# EAGLE board module_RevD (EAGLE 9.1.1)
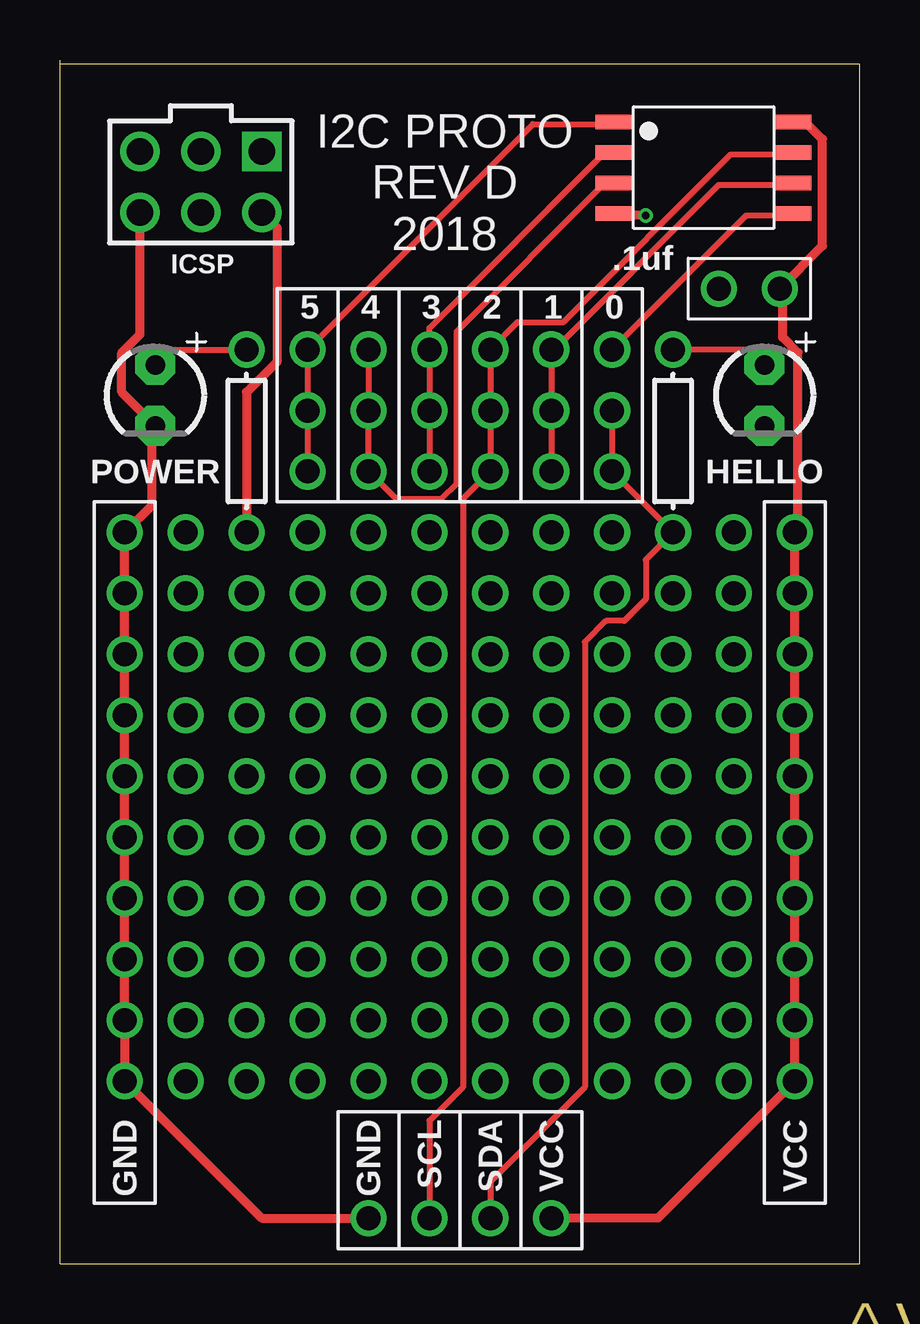
[diagram p0: board, top side]
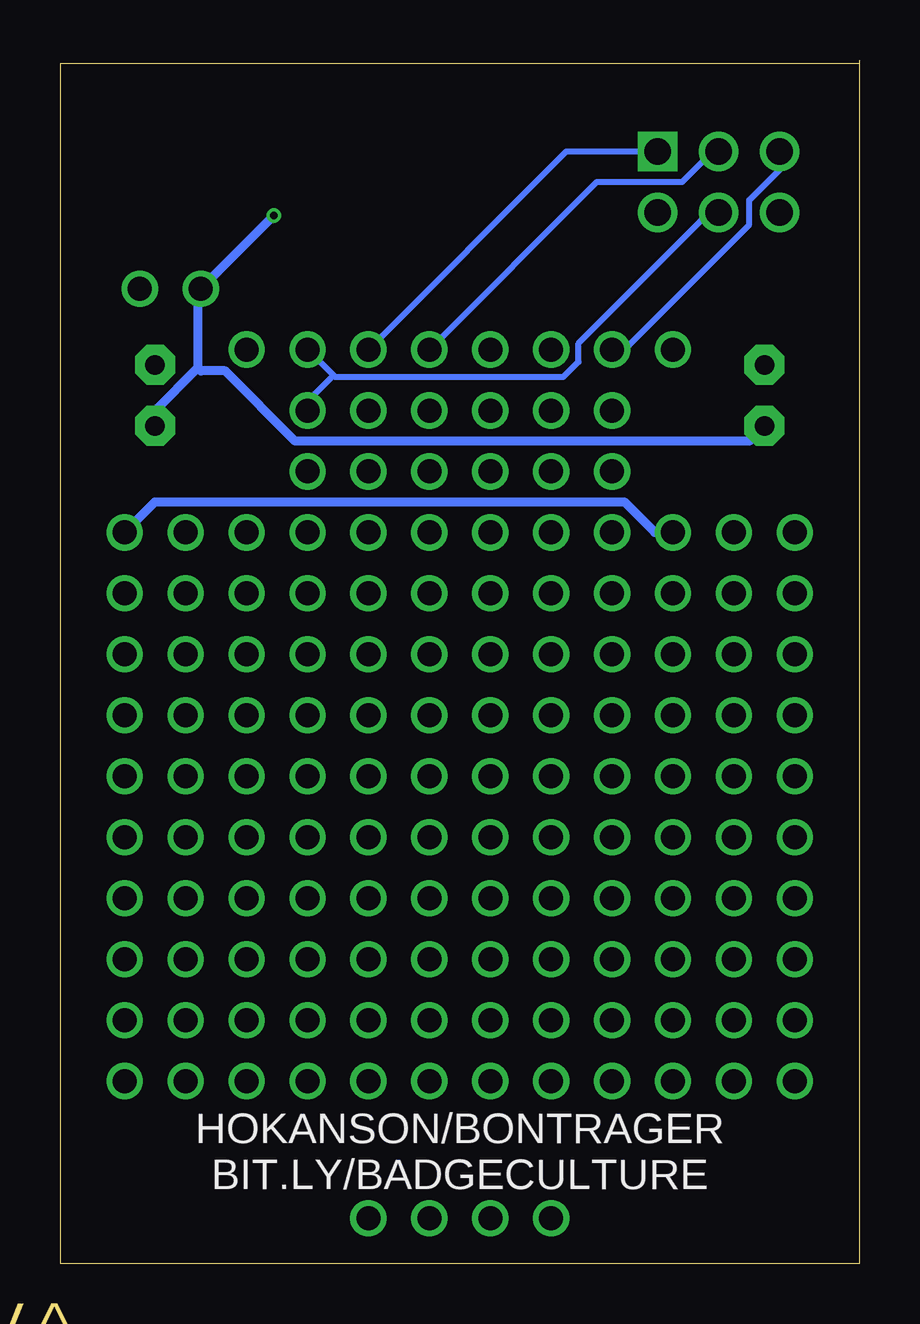
[diagram p1: board, bottom side, seen from below]

Size 33.34 x 50.16 mm. Coordinates in mm from the lower left corner, seen from the top.
Outline: 33.33,0 33.33,50 0,50
Outline: 0,50.16 0,0 33.34,0
Copper layers (1*16): Top 0.035mm / dielectric 1.5mm / Bottom 0.035mm
Design rules "Seeed_40mil_clearance *": minimum track width 6mil, minimum drill 12mil, track to track 6mil, track to pad 6mil, pad to pad 6mil, via to via 6mil, smd to smd 0mil, copper to edge 1.5mm, drill to drill 10mil, minimum pad ring 10mil, minimum via ring 6mil, stop-mask expansion 2mil, vias tented up to drill 100mil, thermal gap 10mil
Net classes: 0 default: width 0.254 mm, clearance 0.254 mm; 1 VCC: width 0.381 mm, clearance 0.254 mm; 2 GND: width 0.381 mm, clearance 0.254 mm

## Footprints (pad centres in the part's own frame; a part is rotated, then mirrored left to right if it is on the bottom)
LED3MM = drill 0.813 pad 1.676 octagon: NEG 1.27,0; POS -1.27,0
SOT127P798X216-8N = smd 1.5 x 0.6: GND -3.75,-1.905; PB0 3.75,-1.905; PB1 3.75,-0.635; PB2 3.75,0.635; PB3 -3.75,0.635; PB4 -3.75,-0.635; PB5 -3.75,1.905; VCC 3.75,1.905
HDRV6W64P254_2X3_762X508X868P = drill 1.1 pad 1.65: 0/MOSI/SDA 0,1.27; 2/SCK/SCL 0,3.81; 5/RST -2.54,3.81; GND -2.54,1.27; VCC 2.54,1.27 | drill 1.1 pad 1.65 square: 1/MISO 2.54,3.81
1X01 = drill 1: P$1 0,0
DECOUPLING_CAP = drill 1: P$1 0,0; P$2 2.54,0
AXIAL-0.3 = drill 1: P$3 -3.81,0; P$4 3.81,0

## Placement (x,y rotation side)
HELLO  LED3MM  [LED3MM]  29.37,36.2 270 top
IC1  ATTINY85-20SU  [SOT127P798X216-8N]  26.83,45.68 0 top
J1  M20-9980346  [HDRV6W64P254_2X3_762X508X868P]  5.88,42.55 0 top
POWER  LED3MM  [LED3MM]  3.97,36.2 270 top
U$1  ONE_PAD  [1X01]  7.78,15.24 0 top
U$2  ONE_PAD  [1X01]  5.24,22.86 0 top
U$3  ONE_PAD  [1X01]  5.24,20.32 0 top
U$4  ONE_PAD  [1X01]  5.24,17.78 0 top
U$5  ONE_PAD  [1X01]  5.24,15.24 0 top
U$6  ONE_PAD  [1X01]  5.24,12.7 0 top
U$7  ONE_PAD  [1X01]  5.24,10.16 0 top
U$8  ONE_PAD  [1X01]  5.24,7.62 0 top
U$9  ONE_PAD  [1X01]  7.78,22.86 0 top
U$10  ONE_PAD  [1X01]  7.78,12.7 90 top
U$11  ONE_PAD  [1X01]  7.78,20.32 0 top
U$12  ONE_PAD  [1X01]  7.78,10.16 0 top
U$13  ONE_PAD  [1X01]  7.78,17.78 0 top
U$14  ONE_PAD  [1X01]  7.78,7.62 0 top
U$15  ONE_PAD  [1X01]  10.32,22.86 0 top
U$16  ONE_PAD  [1X01]  12.86,22.86 0 top
U$17  ONE_PAD  [1X01]  10.32,10.16 0 top
U$18  ONE_PAD  [1X01]  10.32,20.32 0 top
U$19  ONE_PAD  [1X01]  12.86,20.32 0 top
U$20  ONE_PAD  [1X01]  10.32,7.62 0 top
U$21  ONE_PAD  [1X01]  10.32,17.78 0 top
U$22  ONE_PAD  [1X01]  12.86,17.78 0 top
U$23  ONE_PAD  [1X01]  12.86,10.16 0 top
U$24  ONE_PAD  [1X01]  10.32,15.24 0 top
U$25  ONE_PAD  [1X01]  12.86,15.24 0 top
U$26  ONE_PAD  [1X01]  12.86,7.62 0 top
U$27  ONE_PAD  [1X01]  10.32,12.7 0 top
U$28  ONE_PAD  [1X01]  12.86,12.7 0 top
U$29  ONE_PAD  [1X01]  15.4,22.86 0 top
U$30  ONE_PAD  [1X01]  17.94,22.86 0 top
U$31  ONE_PAD  [1X01]  20.48,22.86 0 top
U$32  ONE_PAD  [1X01]  23.02,22.86 0 top
U$33  ONE_PAD  [1X01]  15.4,20.32 0 top
U$34  ONE_PAD  [1X01]  17.94,20.32 0 top
U$35  ONE_PAD  [1X01]  20.48,20.32 0 top
U$36  ONE_PAD  [1X01]  23.02,20.32 0 top
U$37  ONE_PAD  [1X01]  15.4,17.78 0 top
U$38  ONE_PAD  [1X01]  17.94,17.78 0 top
U$39  ONE_PAD  [1X01]  20.48,17.78 0 top
U$40  ONE_PAD  [1X01]  23.02,17.78 0 top
U$41  ONE_PAD  [1X01]  15.4,15.24 0 top
U$42  ONE_PAD  [1X01]  17.94,15.24 0 top
U$43  ONE_PAD  [1X01]  20.48,15.24 0 top
U$44  ONE_PAD  [1X01]  23.02,15.24 0 top
U$45  ONE_PAD  [1X01]  15.4,12.7 0 top
U$46  ONE_PAD  [1X01]  17.94,12.7 0 top
U$47  ONE_PAD  [1X01]  20.48,12.7 0 top
U$48  ONE_PAD  [1X01]  23.02,12.7 0 top
U$49  ONE_PAD  [1X01]  15.4,10.16 0 top
U$50  ONE_PAD  [1X01]  17.94,10.16 0 top
U$51  ONE_PAD  [1X01]  20.48,10.16 0 top
U$52  ONE_PAD  [1X01]  23.02,10.16 0 top
U$53  ONE_PAD  [1X01]  15.4,7.62 0 top
U$54  ONE_PAD  [1X01]  17.94,7.62 0 top
U$55  ONE_PAD  [1X01]  20.48,7.62 0 top
U$56  ONE_PAD  [1X01]  23.02,7.62 0 top
U$57  ONE_PAD  [1X01]  25.56,22.86 0 top
U$58  ONE_PAD  [1X01]  28.1,22.86 0 top
U$59  ONE_PAD  [1X01]  25.56,10.16 0 top
U$60  ONE_PAD  [1X01]  25.56,20.32 0 top
U$61  ONE_PAD  [1X01]  28.1,20.32 0 top
U$62  ONE_PAD  [1X01]  25.56,7.62 0 top
U$63  ONE_PAD  [1X01]  25.56,17.78 0 top
U$64  ONE_PAD  [1X01]  28.1,17.78 0 top
U$65  ONE_PAD  [1X01]  28.1,10.16 0 top
U$66  ONE_PAD  [1X01]  25.56,15.24 0 top
U$67  ONE_PAD  [1X01]  28.1,15.24 0 top
U$68  ONE_PAD  [1X01]  28.1,7.62 0 top
U$69  ONE_PAD  [1X01]  25.56,12.7 0 top
U$70  ONE_PAD  [1X01]  28.1,12.7 0 top
U$71  GND  [1X01]  12.86,1.91 180 top
U$72  SDA  [1X01]  17.94,1.91 0 top
U$73  SCL  [1X01]  15.4,1.91 0 top
U$74  VCC  [1X01]  20.48,1.91 90 top
U$75  ONE_PAD  [1X01]  23.02,38.1 0 top
U$76  ONE_PAD  [1X01]  23.02,35.56 0 top
U$77  ONE_PAD  [1X01]  23.02,33.02 0 top
U$78  ONE_PAD  [1X01]  20.48,38.1 0 top
U$79  ONE_PAD  [1X01]  20.48,35.56 0 top
U$80  ONE_PAD  [1X01]  20.48,33.02 0 top
U$81  ONE_PAD  [1X01]  17.94,38.1 0 top
U$82  ONE_PAD  [1X01]  17.94,33.02 0 top
U$83  ONE_PAD  [1X01]  17.94,35.56 0 top
U$84  ONE_PAD  [1X01]  15.4,38.1 0 top
U$85  ONE_PAD  [1X01]  15.4,33.02 0 top
U$86  ONE_PAD  [1X01]  15.4,35.56 0 top
U$87  ONE_PAD  [1X01]  12.86,35.56 0 top
U$88  ONE_PAD  [1X01]  12.86,38.1 0 top
U$89  ONE_PAD  [1X01]  12.86,33.02 0 top
U$90  ONE_PAD  [1X01]  10.32,35.56 0 top
U$91  ONE_PAD  [1X01]  10.32,38.1 0 top
U$92  ONE_PAD  [1X01]  10.32,33.02 0 top
U$93  ONE_PAD  [1X01]  5.24,25.4 90 top
U$94  ONE_PAD  [1X01]  5.24,27.94 90 top
U$95  ONE_PAD  [1X01]  5.24,30.48 90 top
U$96  ONE_PAD  [1X01]  23.02,30.48 90 top
U$97  ONE_PAD  [1X01]  7.78,25.4 90 top
U$98  ONE_PAD  [1X01]  7.78,27.94 90 top
U$99  ONE_PAD  [1X01]  2.7,17.78 0 top
U$100  ONE_PAD  [1X01]  2.7,30.48 0 top
U$101  ONE_PAD  [1X01]  10.32,25.4 90 top
U$102  ONE_PAD  [1X01]  10.32,27.94 90 top
U$103  ONE_PAD  [1X01]  10.32,30.48 90 top
U$104  ONE_PAD  [1X01]  28.1,30.48 90 top
U$105  ONE_PAD  [1X01]  12.86,25.4 90 top
U$106  ONE_PAD  [1X01]  12.86,27.94 90 top
U$107  ONE_PAD  [1X01]  12.86,30.48 90 top
U$108  ONE_PAD  [1X01]  25.56,27.94 90 top
U$109  ONE_PAD  [1X01]  15.4,25.4 90 top
U$110  ONE_PAD  [1X01]  15.4,27.94 90 top
U$111  ONE_PAD  [1X01]  15.4,30.48 90 top
U$112  ONE_PAD  [1X01]  28.1,27.94 90 top
U$113  ONE_PAD  [1X01]  17.94,25.4 90 top
U$114  ONE_PAD  [1X01]  17.94,27.94 90 top
U$115  ONE_PAD  [1X01]  17.94,30.48 90 top
U$116  ONE_PAD  [1X01]  25.56,25.4 90 top
U$117  ONE_PAD  [1X01]  20.48,25.4 90 top
U$118  ONE_PAD  [1X01]  20.48,27.94 90 top
U$119  ONE_PAD  [1X01]  20.48,30.48 90 top
U$120  ONE_PAD  [1X01]  28.1,25.4 90 top
U$121  ONE_PAD  [1X01]  23.02,25.4 90 top
U$122  ONE_PAD  [1X01]  23.02,27.94 90 top
U$123  DECOUPLING_CAP  [DECOUPLING_CAP]  27.46,40.64 0 top
U$124  ONE_PAD  [1X01]  2.7,15.24 0 top
U$125  ONE_PAD  [1X01]  2.7,27.94 0 top
U$126  RESISTOR  [AXIAL-0.3]  7.78,34.29 270 top
U$127  RESISTOR  [AXIAL-0.3]  25.56,34.29 270 top
U$128  ONE_PAD  [1X01]  2.7,12.7 0 top
U$129  ONE_PAD  [1X01]  2.7,25.4 0 top
U$130  ONE_PAD  [1X01]  2.7,10.16 0 top
U$131  ONE_PAD  [1X01]  2.7,22.86 0 top
U$132  ONE_PAD  [1X01]  2.7,7.62 0 top
U$133  ONE_PAD  [1X01]  2.7,20.32 0 top
U$134  ONE_PAD  [1X01]  30.64,17.78 0 top
U$135  ONE_PAD  [1X01]  30.64,30.48 0 top
U$136  ONE_PAD  [1X01]  30.64,15.24 0 top
U$137  ONE_PAD  [1X01]  30.64,27.94 0 top
U$138  ONE_PAD  [1X01]  30.64,12.7 0 top
U$139  ONE_PAD  [1X01]  30.64,25.4 0 top
U$140  ONE_PAD  [1X01]  30.64,10.16 0 top
U$141  ONE_PAD  [1X01]  30.64,22.86 0 top
U$142  ONE_PAD  [1X01]  30.64,7.62 0 top
U$143  ONE_PAD  [1X01]  30.64,20.32 0 top

## Library data of the parts
HELLO POWER U$1-U$143 = BadgeParts
IC1 = BadgeParts; ARROW_PART_NUMBER: ATTINY85-20SU; ARROW_PRICE/STOCK: https://www.arrow.com/en/products/attiny85-20su/microchip-technology; DESCRIPTION: MICROCHIP - ATTINY85-20SU - MICROCONTROLLER MCU, 8 BIT, ATTINY, 20MHZ, SOIC-8; HEIGHT: 2.16mm; MANUFACTURER_NAME: Microchip; MANUFACTURER_PART_NUMBER: ATTINY85-20SU; RS_PART_NUMBER: 1331674; RS_PRICE/STOCK: http://uk.rs-online.com/web/p/products/1331674
J1 = BadgeParts; ARROW_PART_NUMBER: M20-9980346; ARROW_PRICE/STOCK: http://uk.rs-online.com/web/p/products/7457046P; DESCRIPTION: 03+03 DIL Vertical Pin Header HARWIN M20 Series, 2.54mm Pitch 6 Way 2 Row Straight PCB Header, Solder Termination, 3A; HEIGHT: 8.68mm; MANUFACTURER_NAME: HARWIN; MANUFACTURER_PART_NUMBER: M20-9980346; RS_PART_NUMBER: 7457046P; RS_PRICE/STOCK: http://uk.rs-online.com/web/p/products/7457046P

## Nets
GND [GND]: HELLO.NEG IC1.GND J1.GND POWER.NEG U$71.P$1 U$99.P$1 U$100.P$1 U$123.P$1 U$124.P$1 U$125.P$1 U$128.P$1 U$129.P$1 U$130.P$1 U$131.P$1 U$132.P$1 U$133.P$1
N$1: POWER.POS U$126.P$3
N$2: HELLO.POS U$127.P$3
PB0: IC1.PB0 J1.0/MOSI/SDA U$72.P$1 U$75.P$1 U$76.P$1 U$77.P$1 U$127.P$4
PB1: IC1.PB1 J1.1/MISO U$78.P$1 U$79.P$1 U$80.P$1
PB2: IC1.PB2 J1.2/SCK/SCL U$73.P$1 U$81.P$1 U$82.P$1 U$83.P$1
PB3: IC1.PB3 U$84.P$1 U$85.P$1 U$86.P$1
PB4: IC1.PB4 U$87.P$1 U$88.P$1 U$89.P$1
PB5: IC1.PB5 J1.5/RST U$90.P$1 U$91.P$1 U$92.P$1
VCC [VCC]: IC1.VCC J1.VCC U$74.P$1 U$123.P$2 U$126.P$4 U$134.P$1 U$135.P$1 U$136.P$1 U$137.P$1 U$138.P$1 U$139.P$1 U$140.P$1 U$141.P$1 U$142.P$1 U$143.P$1

## Tracks (layer width: path | path; a pad name or v marks a point on that pad's centre or on a via)
GND  (via drill 0.3)
  Top 0.381: v24.42,43.69 23.15,43.69 IC1.GND | J1.GND 3.33,38.73 2.57,37.97 2.57,36.32 POWER.NEG 3.84,34.8 3.84,31.62 U$100.P$1 U$125.P$1 U$129.P$1 U$131.P$1 U$133.P$1 U$99.P$1 U$124.P$1 U$128.P$1 U$130.P$1 U$132.P$1 8.41,1.91 U$71.P$1
  Bottom 0.381: v24.42,43.69 U$123.P$1 27.59,40.51 27.59,37.34 | HELLO.NEG 29.37,35.56 27.59,37.34 | POWER.NEG 4.61,34.29 23.53,34.29 26.45,37.21 27.46,37.21 27.59,37.34
N$1
  Top 0.254: U$126.P$3 4.61,38.1 POWER.POS
N$2
  Top 0.254: U$127.P$3 28.73,38.1 HELLO.POS
PB0
  Top 0.254: U$76.P$1 U$77.P$1 U$127.P$4 24.42,29.34 24.42,27.69 23.53,26.8 22.77,26.8 21.88,25.91 21.88,7.37 17.94,3.43 U$72.P$1 | U$75.P$1 28.61,43.69 30.51,43.69 IC1.PB0
  Bottom 0.254: J1.0/MOSI/SDA 6.26,43.81 11.72,38.35 11.72,37.59 12.35,36.96 21.88,36.96 21.94,37.02 | U$75.P$1 21.94,37.02 | U$76.P$1 23.02,35.94 21.94,37.02
PB1
  Top 0.254: U$80.P$1 U$79.P$1 U$78.P$1 20.61,38.1 27.46,44.96 30.51,44.96 IC1.PB1
  Bottom 0.254: J1.1/MISO 12.22,46.35 U$78.P$1
PB2
  Top 0.254: U$73.P$1 15.4,5.97 16.8,7.37 16.8,31.88 U$82.P$1 U$83.P$1 U$81.P$1 19.08,39.24 20.99,39.24 27.97,46.23 30.51,46.23 IC1.PB2
  Bottom 0.254: J1.2/SCK/SCL 6.13,46.35 7.4,45.09 10.96,45.09 U$81.P$1
PB3
  Top 0.254: U$85.P$1 U$86.P$1 U$84.P$1 15.4,38.99 22.64,46.23 23.02,46.23 IC1.PB3
PB4
  Top 0.254: U$88.P$1 U$87.P$1 U$89.P$1 14,31.88 15.91,31.88 16.54,32.51 16.54,38.86 22.64,44.96 23.02,44.96 IC1.PB4
PB5
  Top 0.254: U$92.P$1 U$90.P$1 U$91.P$1 19.72,47.5 23.02,47.5 IC1.PB5
  Bottom 0.254: J1.5/RST 3.33,45.59 4.61,44.32 4.61,43.31 9.81,38.1 U$91.P$1
VCC
  Top 0.381: U$126.P$4 7.78,36.32 9.05,37.59 9.05,43.18 J1.VCC | IC1.VCC 30.64,47.5 31.15,47.5 31.78,46.86 31.78,42.42 U$123.P$2 30.13,40.51 30.13,38.61 30.77,37.97 30.77,30.61 U$135.P$1 U$137.P$1 U$139.P$1 U$141.P$1 U$143.P$1 U$134.P$1 U$136.P$1 U$138.P$1 U$140.P$1 U$142.P$1 24.93,1.91 U$74.P$1
  Bottom 0.381: U$126.P$4 8.54,30.48 9.81,31.75 29.37,31.75 U$135.P$1

## Text on the board
Dimension: ^ V-Groove
tPlace: I2C PROTO / REV D / 2018 | .1uf | 5 | 4 | 3 | 2 | 1 | 0 | POWER | HELLO | GND | GND | SCL | SDA | VCC | VCC
bPlace: HOKANSON/BONTRAGER / BIT.LY/BADGECULTURE